# Altium PCB Arduino_CH32X033F8P6.PcbDoc
Units mm, origin at the board's own origin, x right, y up, seen from the top; angles counter-clockwise.
Board outline 31.03 x 20.63 mm, 2 copper layers (Top Layer, Bottom Layer); 21 components, 24 nets, 98 pads, 194 vias.
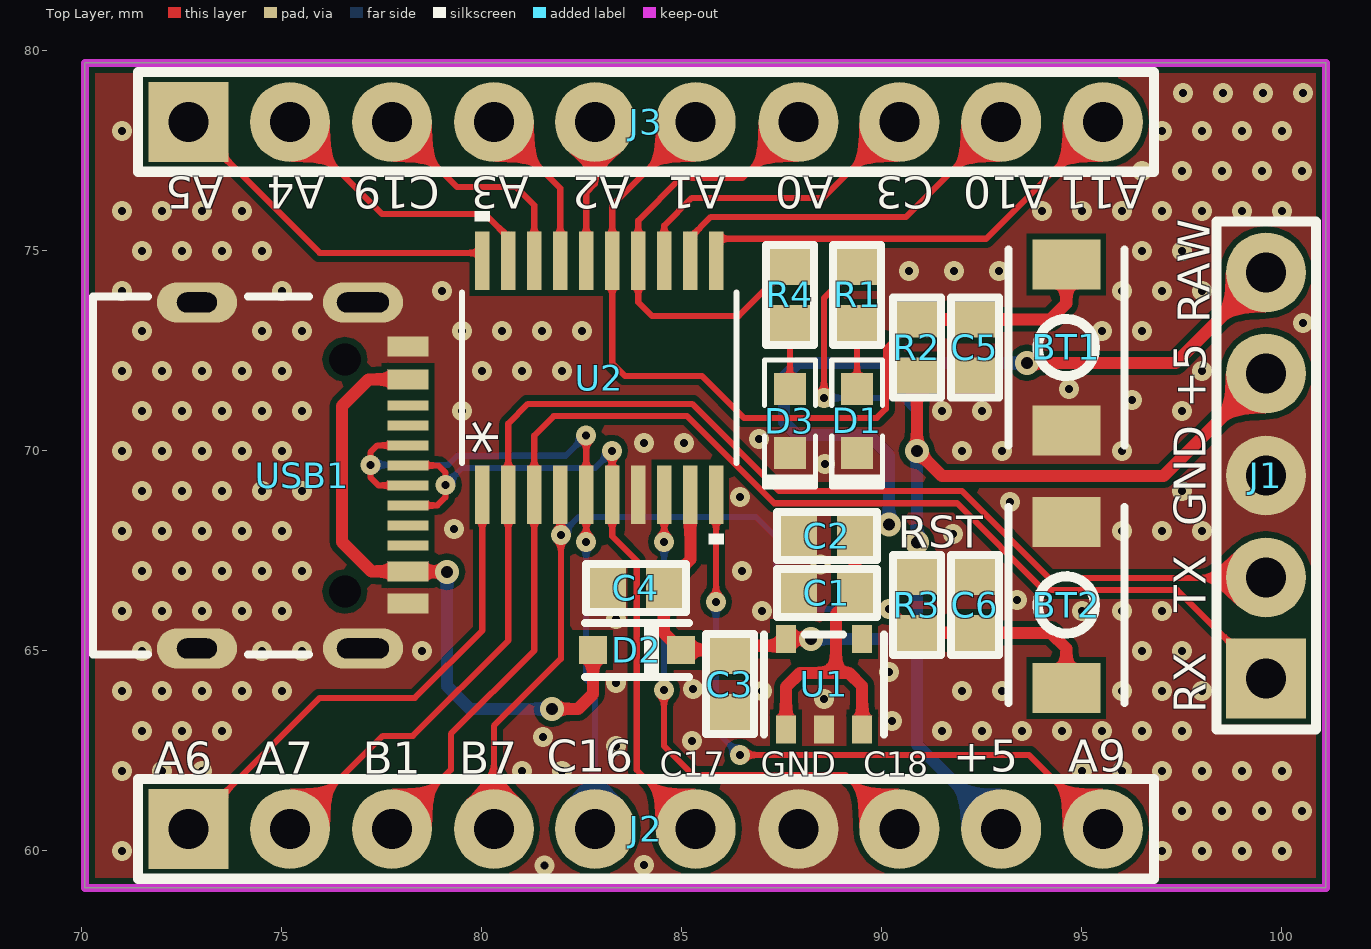
[diagram p0: Top Layer view]
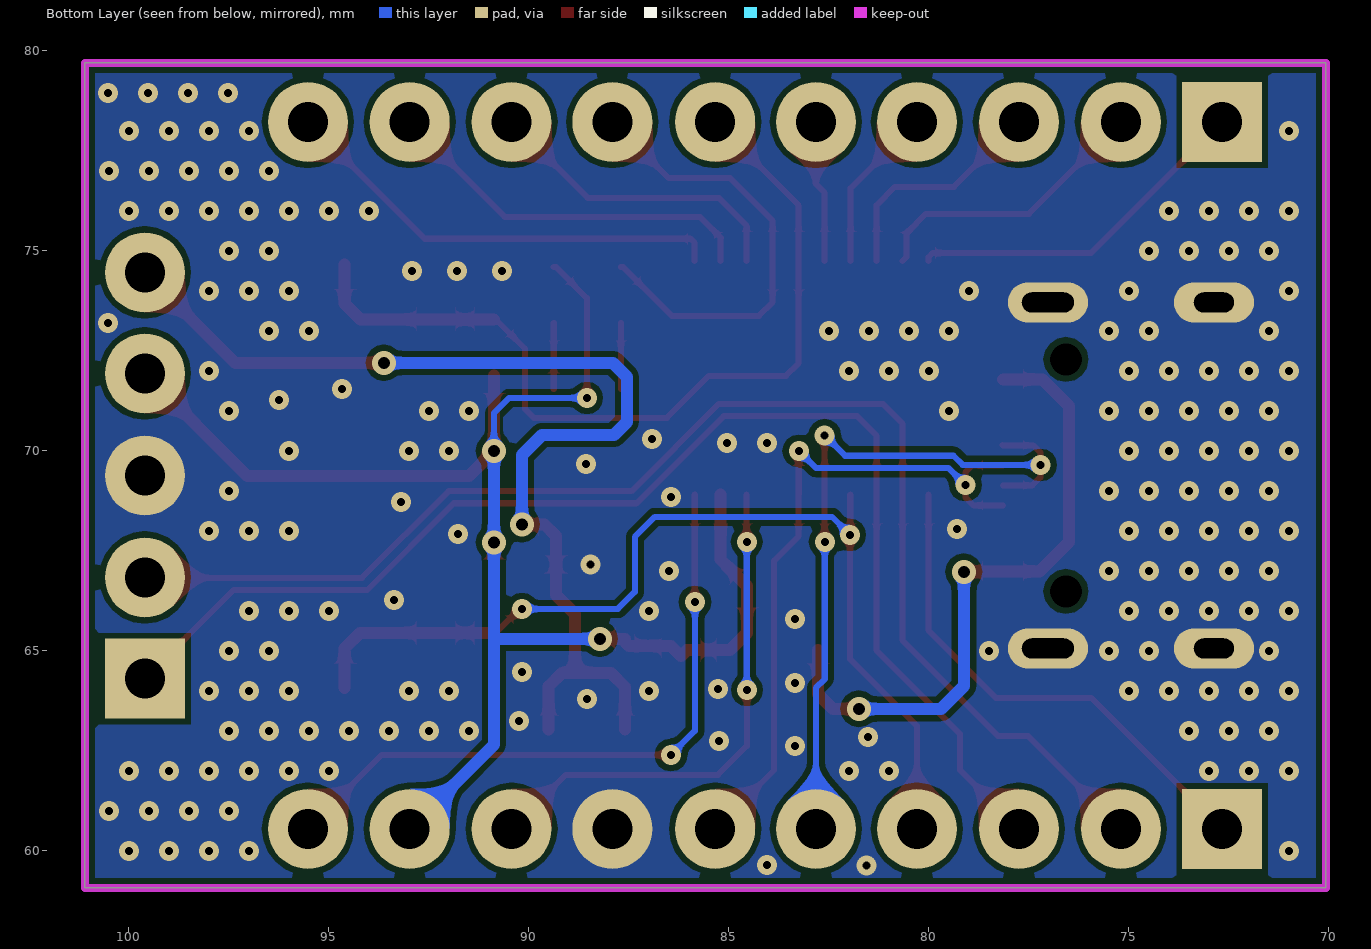
[diagram p1: Bottom Layer view, seen from below]
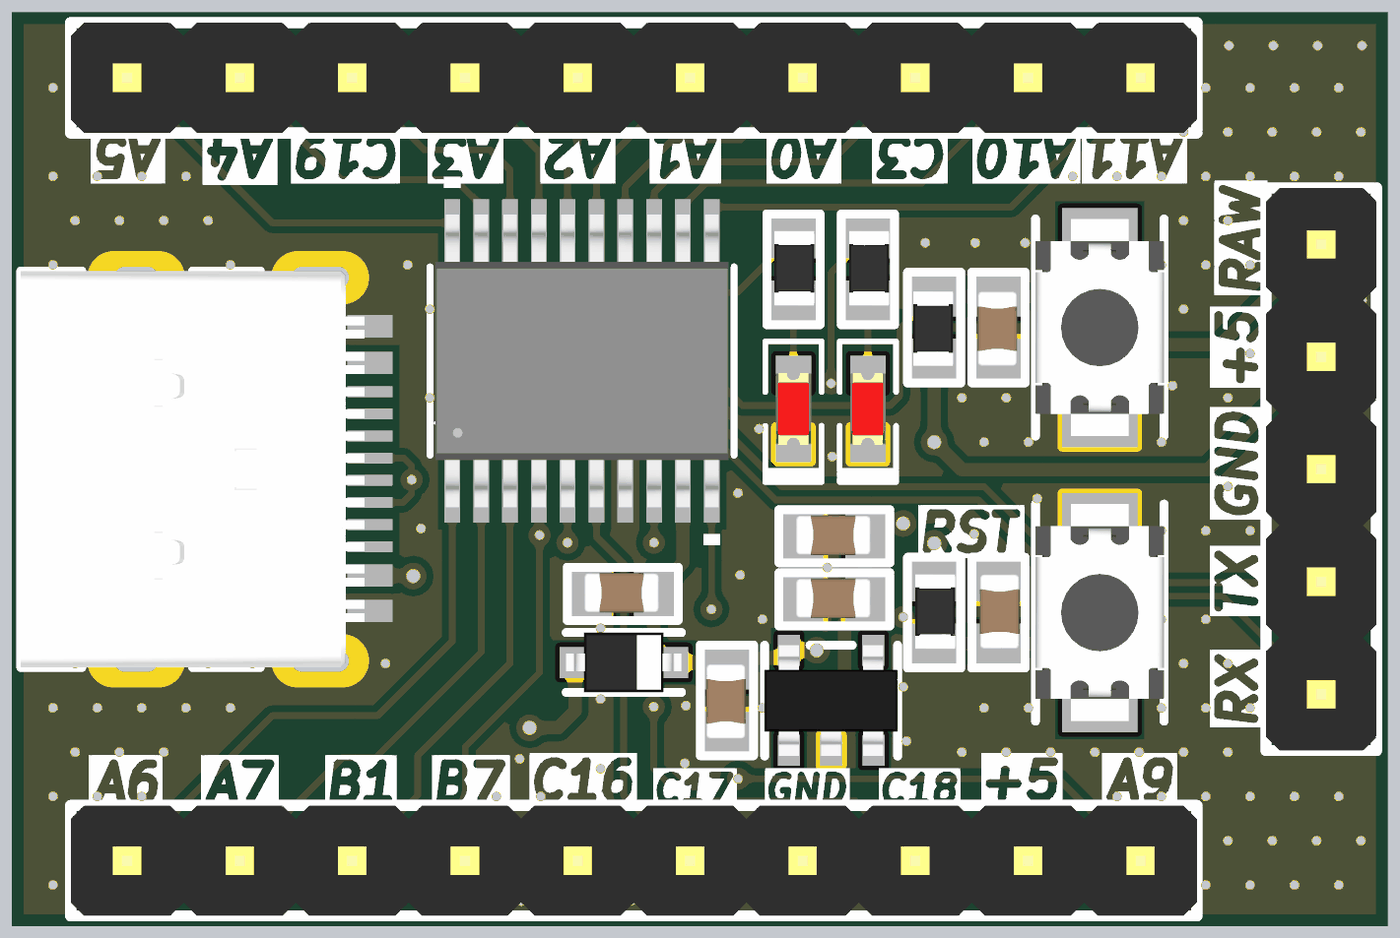
[diagram p2: 3D render of the assembled board from above, using the file's embedded part models]

## Layer stack, top to bottom
Top Solder: solder mask 0.0102, Solder Resist, Dk 3.5
Top Layer: signal copper 0.0356
Dielectric 1: dielectric 0.32, FR-4, Dk 4.8
Bottom Layer: signal copper 0.0356
Bottom Solder: solder mask 0.0102, Solder Resist, Dk 3.5

## Board outline
70.075,59.075 101.1,59.075 101.1,79.7 70.075,79.7

## Design rules (kind name [scope] priority, off if disabled: settings)
Clearance [All] p1: gap=0.152 ignorepadtopadclearanceinfootprint=FALSE
PlaneConnect [All] p1: planeconnectstyle=Direct reliefexpansion=0.508 reliefentries=4 reliefconductorwidth=0.254 reliefairgap=0.254
PolygonConnect [All] p1: connectstyle=Direct reliefconductorwidth=0.254 reliefentries=4 polygonreliefangle="90 Angle" airgapwidth=0.254
RoutingVias [All] p1: holewidth=0.3 width=0.6 viastyle="Through Hole" minholewidth=0.2 minwidth=0.5 maxholewidth=0.5 maxwidth=1
SolderMaskExpansion [All] p1: expansion=0.102 istentingtop=FALSE
Width [All] p1: maxlimit=0.5 minlimit=0.152 preferedwidth=0.3
29 further rules are at their usual default settings.

## Classes and differential pairs
component class Arduino_CH32X033F8P6: BT1 BT2 C3 C4 C5 C6 D1 D3 R1 R2 R3 U1 U2 USB1

## Components (designator, comment, footprint, x,y, rotation, side; value= is the part's Value field where it differs from the comment)
BT1 "Button" "Switch 3x4x2mm" 94.61,70.511 r90 top value="SW chip 2 pin"
BT2 "Button" "Switch 3x4x2mm" 94.61,68.225 r270 top value="SW chip 2 pin"
C1 "0.1uF" "CAP 0603" 88.625,66.475 r180 top
C2 "10uF" "CAP 0603" 88.625,67.9 r180 top
C3 "10uF" "CAP 0603" 86.175,64.17 r270 top
C4 "0.1uF" "CAP 0603" 83.85,66.6 r180 top
C5 "0.1uF" "CAP 0603" 92.3,72.586 r270 top
C6 "0.1uF" "CAP 0603" 92.35,66.15 r90 top
D1 "LED" "LED 0603" 89.38,70.75 r270 top
D2 "1N4148" SOD-323 83.875,65.025 r0 top
D3 "LED" "LED 0603" 87.7,70.75 r270 top
J1 "HEADER 5" "HEADER 5" 99.7,69.162 r90 top
J2 "HEADER 10" "HEADER 10" 83.775,60.695 r0 top
J3 "HEADER 10" "HEADER 10" 83.775,78.37 r0 top
R1 "10K" "RES 0603" 89.405,73.925 r90 top
R2 "100K" "RES 0603" 90.85,72.561 r270 top
R3 "100K" "RES 0603" 90.9,66.175 r90 top
R4 "10K" "RES 0603" 87.725,73.925 r90 top
U1 "MIC5205" SOT23-5 87.601,63.041 r0 top
U2 "CH32X033F8P6" TSSOP20_STM 82.933,71.831 r90 top
USB1 "USB Type C SMD" "USB TYPE C" 74.275,69.363 r90 top

## Footprints (in the part's own frame and the unit in brackets; to place one, negate y for a bottom-side part, rotate by r counter-clockwise, add the part's x,y. Pads: shape width x height; smd on the part's side, far side on the other; paste and mask are expansions set on the pad)
"CAP 0603" [mm]
  rect 0.9x1 smd: 1(-0.7,0.025) 2(0.7,0.025)
  silkscreen extent -1.25,-0.58 1.25,0.63, body extent -0.82,-0.45 0.88,0.45, height 0.9
"HEADER 5" [mm]
  rect 2x2 hole 1: 1(-4.855,0.1)
  round 2 hole 1: 2(-2.325,0.1) 3(0.225,0.1) 4(2.775,0.1) 5(5.3,0.1)
  silkscreen extent -6.12,-1.15 6.58,1.34, body extent -6.12,-1.15 6.58,1.34, height 8.54
"HEADER 10" [mm]
  rect 2x2 hole 1: 1(-11.105,-0.145)
  round 2 hole 1: 2(-8.575,-0.145) 3(-6.025,-0.145) 4(-3.475,-0.145) 5(-0.95,-0.145) 6(1.57,-0.145) 7(4.14,-0.145) 8(6.66,-0.145) 9(9.205,-0.145) 10(11.75,-0.145)
  silkscreen extent -12.38,-1.39 13.02,1.1, body extent -12.38,-1.39 13.02,1.1, height 8.54
"LED 0603" [mm] "Chip LED, 2-Leads, Body 1.6x0.8mm, IPC Medium Density"
  rect 0.8x0.8 smd: 1(-0.8,0) 2(0.8,0)
  silkscreen extent -1.52,-0.64 1.65,0.64, body extent -0.81,-0.4 0.81,0.4, height 0.6
"RES 0603" [mm]
  rect 0.9x1 smd: 1(-0.725,0.025) 2(0.675,0.025)
  silkscreen extent -1.28,-0.58 1.22,0.63, body extent -0.85,-0.45 0.85,0.45, height 0.55
SOD-323 [mm]
  rect 0.7x0.7 smd: 1(-1.1,0) 2(1.1,0)
  silkscreen extent -1.3,-0.67 1.3,0.67, body extent -1.3,-0.67 1.3,0.67, height 1.1
SOT23-5 [mm]
  rect 0.5x0.7 smd: 1(0,0) 2(0.95,0) 3(1.905,0) 4(1.899,2.259) 5(0,2.259)
  silkscreen extent -0.55,-0.13 2.45,2.37, body extent -0.55,-0.13 2.45,2.37, height 1.1
"Switch 3x4x2mm" [mm]
  rect 1.25x1.7 smd: 1(0,0) 2(4.15,0)
  silkscreen extent -0.37,-1.45 4.53,1.45, body extent -0.37,-1.45 4.53,1.45, height 2
TSSOP20_STM [mm]
  rect 1.462x0.355 smd paste+0 mask+0: 1(-2.921,2.925) 2(-2.921,2.275) 3(-2.921,1.625) 4(-2.921,0.975) 5(-2.921,0.325) 6(-2.921,-0.325) 7(-2.921,-0.975) 8(-2.921,-1.625) 9(-2.921,-2.275) 10(-2.921,-2.925) 11(2.921,-2.925) 12(2.921,-2.275) 13(2.921,-1.625) 14(2.921,-0.975) 15(2.921,-0.325) 16(2.921,0.325) 17(2.921,0.975) 18(2.921,1.625) 19(2.921,2.275) 20(2.921,2.925)
  silkscreen extent -4.16,-3.43 4.16,3.43, body extent -3.3,-3.3 3.3,3.3, height 1.2
"USB TYPE C" [mm]
  round 0.65 hole 0.8: 0(-2.875,-2.3) 0(2.925,-2.3)
  rect 0.508x1.016 smd paste+0 mask+0: A1(3.25,-3.875) A4(2.425,-3.875) A9(-2.375,-3.875) A12(-3.175,-3.875)
  oval 1x2 hole 0.5 slot 1.3 at 90 deg: A1(4.35,-2.75) A12(-4.3,-2.75)
  oval 1x2 hole 0.5 slot 1 at 90 deg: A1(4.35,1.4) A12(-4.3,1.4)
  rect 0.254x1.016 smd paste+0 mask+0: A5(1.275,-3.875) A6(0.275,-3.875) A7(-0.225,-3.875) A8(-1.225,-3.875) B5(-1.725,-3.875) B6(-0.725,-3.875) B7(0.775,-3.875) B8(1.775,-3.875)
  silkscreen extent -4.45,-1.4 4.5,4, body extent -4.45,-3.75 4.5,4, height 3.26

## Part data
BT1 BT2: library part "Button 2 Pin"
C1 C2 C3 C4 C5 C6: library part "Capacitor SMD"
D1 D3: library part Led
D2: library part Diode
J1: library part "Header 5"
J2 J3: library part "Header 10"
R1 R2 R3 R4: library part "Resistor SMD"
U1: "150mA Low-Noise LDO Regulator"
U2: library part CH32X035/X033
USB1: library part "USB Type C 16"

## Via types
v1: diameter 0.5, hole 0.2, Top Layer to Bottom Layer, tented both sides, 187 vias
v2: diameter 0.6, hole 0.3, Top Layer to Bottom Layer, tented both sides, 7 vias

## Nets (pads, with @x,y where several pads share a name; then routed paths per layer and width w, separated by ;. In a path a pad name is that pad's centre, name@x,y a point inside that pad or via, vN(x,y) a via of type N, cw(c..) or ccw(c..) an arc to the next point about the centre after c; other vN are vias at no path point)
+5: C3.1 C4.1 D2.2 J1.4 J2.9 R1.2 R2.2 R3.2 U1.5 U2.9 | length 40.6
  Top Layer w0.152: U2.9@85.204,68.906 U2.9 ; v1(88.55,71.325) 88.55,73.82 89.33,74.6 R1.2
  Top Layer w0.3: U2.9 85.208,67.283 84.55,66.625 84.55,65.45 D2.2 86.045,65.025 C3.1 86.455,65.125 87.501,65.125 87.601,65.225 U1.5 v2(88.225,65.3) ; R3.2 v2(90.875,67.716) ; R2.2 v2(90.875,70) 91.5,69.375 97.038,69.375 J1.4
  Bottom Layer w0.152: v1(88.55,71.325) 90.493,71.325 90.875,70.943 v2(90.875,70)
  Bottom Layer w0.3: v2(88.225,65.3) 90.761,65.3 ; v2(90.875,70) v2(90.875,67.716) 90.875,62.655 J2.9
+RAW: C1.1 C2.1 J1.5 U1.1 U1.3 | length 27.9
  Top Layer w0.3: U1.1 87.601,64.101 87.95,64.45 88.85,64.45 ; U1.3 89.506,64.119 89.175,64.45 88.85,64.45 ; v2(90.175,68.163) 89.613,68.163 C2.1 C1.1 89.325,66.4 88.85,65.925 88.85,64.45 ; v2(93.625,72.2) 97.338,72.2 J1.5
  Bottom Layer w0.3: v2(90.175,68.163) 90.175,69.9 89.675,70.4 87.875,70.4 87.55,70.725 87.55,71.85 87.9,72.2 v2(93.625,72.2)
BT_USER: BT1.2 C5.1 J3.6 R2.1 U2.15 | length 21.9
  Top Layer w0.152: J3.6 83.258,76.138 U2.15 83.258,72.192 83.575,71.875 85.5,71.875 86.55,70.825 89.875,70.825 90.1,71.05 90.1,72.561 90.825,73.286 R2.1
  Top Layer w0.3: R2.1 C5.1 94.211,73.286 94.61,73.685 BT1.2
GND: BT1.1 BT2.1 C1.2 C2.2 C3.2 C4.2 C5.2 C6.2 D1.2 D3.2 J1.3 J2.7 U1.2 U2.7 USB1.A1 USB1.A12
  other v1: 81.561,59.641 84.05,59.65 71,60 97,60 98,60 99,60 100,60 97.5,61 98.5,61 99.5,61 100.5,61 71,62 72,62 73,62 81,62 82,62 95,62 96,62 97,62 98,62 99,62 100,62 83.35,62.625 85.25,62.75 81.525,62.85 71.5,63 72.5,63 73.5,63 91.5,63 92.5,63 93.5,63 94.5,63 95.5,63 96.5,63 97.5,63 90.25,63.25 88.55,63.8 71,64 72,64 73,64 74,64 75,64 87,64 92,64 93,64 96,64 97,64 98,64 85.275,64.05 83.35,64.2 90.175,64.475 71.5,65 74.5,65 75.5,65 78.5,65 96.5,65 97.5,65 83.35,65.8 71,66 72,66 73,66 74,66 75,66 87,66 95,66 96,66 97,66 93.375,66.275 71.5,67 72.5,67 73.5,67 74.5,67 75.5,67 86.5,67 88.463,67.167 91.775,67.925 71,68 72,68 73,68 74,68 75,68 96,68 97,68 98,68 79.3,68.05 93.2,68.725 86.45,68.85 71.5,69 72.5,69 73.5,69 74.5,69 75.5,69 97.5,69 88.575,69.675 71,70 72,70 73,70 74,70 75,70 92,70 93,70 96,70 84.05,70.2 85.05,70.2 86.925,70.3 71.5,71 72.5,71 73.5,71 74.5,71 75.5,71 79.5,71 91.5,71 92.5,71 97.5,71 96.25,71.275 94.675,71.55 71,72 72,72 73,72 74,72 75,72 80,72 81,72 82,72 98,72 71.5,73 74.5,73 75.5,73 79.5,73 80.5,73 81.5,73 82.5,73 95.5,73 96.5,73 100.525,73.2 71,74 75,74 79,74 96,74 97,74 98,74 90.675,74.5 91.8,74.5 92.925,74.5 71.5,75 72.5,75 73.5,75 74.5,75 96.5,75 97.5,75 71,76 72,76 73,76 74,76 94,76 95,76 96,76 97,76 98,76 99,76 100,76 96.5,77 97.5,77 98.5,77 99.5,77 100.5,77 71,78 97,78 98,78 99,78 100,78 97.525,78.95 98.525,78.95 99.525,78.95 100.525,78.95
LED_USER: J3.7 R4.2 U2.14 | length 11.5
  Top Layer w0.152: R4.2 87.65,74.6 86.425,73.375 84.25,73.375 83.908,73.717 U2.14 83.908,75.758 84.975,76.825 86.515,76.825 J3.7
NetD1_1: D1.1 R1.1 | length 1.7
  Top Layer w0.152: D1.1 R1.1
NetD2_1: D2.1 USB1.A4 USB1.A9 | length 16.3
  Top Layer w0.3: USB1.A4 77.162,71.787 76.5,71.125 76.5,67.725 77.237,66.988 USB1.A9 78.156,66.981 79.119,66.981 v2(79.125,66.975) ; v2(81.75,63.55) 82.4,63.55 82.775,63.925 D2.1
  Bottom Layer w0.3: v2(79.125,66.975) 79.125,64.125 79.7,63.55 v2(81.75,63.55)
NetD3_1: D3.1 R4.1 | length 1.7
  Top Layer w0.152: D3.1 R4.1
PA2: J3.5 U2.16 | length 3.6
  Top Layer w0.152: U2.16 82.608,76.458 82.825,76.675 J3.5
PA3: J3.4 U2.17 | length 4.2
  Top Layer w0.152: J3.4 81.958,76.567 U2.17
PA4: J3.2 U2.19 | length 7.2
  Top Layer w0.152: J3.2 77.5,75.925 80.075,75.925 80.557,75.443 80.557,74.853 U2.19
PA5: J3.1 U2.20 | length 8.8
  Top Layer w0.152: J3.1 75.945,74.95 79.907,74.95 80.008,74.849 U2.20
PA6: J2.1 U2.1 | length 12.8
  Top Layer w0.152: J2.1 75.945,63.825 78.325,63.825 80.008,65.508 U2.1
PA7: J1.2 J2.2 U2.2 | length 33.8
  Top Layer w0.152: J2.2 77.525,62.875 78.275,62.875 80.658,65.258 U2.2 80.658,70.683 81.15,71.175 85.256,71.175 87.434,68.997 91.343,68.997 92.004,68.996 94.175,66.825 99.588,66.825 J1.2
PA9: J2.10 U2.10 | length 16.6
  Top Layer w0.152: v1(85.85,66.225) 85.854,66.229 85.854,68.906 U2.10 ; v1(86.45,62.4) 93.675,62.4 J2.10
  Bottom Layer w0.152: v1(85.85,66.225) 85.85,63 v1(86.45,62.4)
PA10: J3.9 U2.12 | length 9.5
  Top Layer w0.152: U2.12@85.194,75.32 85.724,75.85 90.605,75.85 J3.9 ; U2.12 U2.12@85.208,75.306
PA11: J3.10 U2.11 | length 11.4
  Top Layer w0.152: U2.11 85.858,75.204 85.959,75.306 92.606,75.306 J3.10
PB1: J1.1 J2.3 U2.3 | length 32.5
  Top Layer w0.152: J2.3 79.225,62.025 79.225,62.925 81.308,65.008 U2.3 81.308,70.383 81.795,70.87 85.129,70.87 87.308,68.692 91.877,68.692 94.049,66.52 97.387,66.52 J1.1
PB7: BT2.2 C6.1 J2.4 R3.1 U2.4 | length 25
  Top Layer w0.152: J2.4 80.3,63.125 81.974,64.799 v1(81.974,67.901) 81.966,67.909 81.966,68.902 U2.4 ; v1(90.177,66.049) 90.226,66.049 90.825,65.45 R3.1
  Top Layer w0.3: R3.1 C6.1 94.225,65.45 94.61,65.065 BT2.2
  Bottom Layer w0.152: v1(81.974,67.901) 82.423,68.35 86.85,68.35 87.35,67.85 87.35,66.475 87.776,66.049 v1(90.177,66.049)
PC3: J3.8 U2.13 | length 7.8
  Top Layer w0.152: U2.13 84.558,75.633 85.25,76.325 88.535,76.325 J3.8
PC16: J2.5 U2.5 USB1.A7 USB1.B7 | length 18.3
  Top Layer w0.152: USB1.A7 77.413,69.137 77.213,69.338 v1(77.213,69.65) 77.213,69.963 77.388,70.138 USB1.B7 USB1.B7@78.156,70.144 ; v1(82.606,70.392) v1(82.606,70.392) 82.607,68.911 U2.5 v1@82.608,67.733
  Bottom Layer w0.152: v1(77.213,69.65) 79.156,69.65 79.386,69.88 82.094,69.88 v1(82.606,70.392) ; v1(82.604,67.729) 82.604,64.296 82.825,64.075 J2.5
PC17: J2.6 U2.6 USB1.A6 USB1.B6 | length 17.5
  Top Layer w0.152: USB1.B6 78.887,68.638 79.087,68.838 v1(79.087,69.15) 79.087,69.463 78.913,69.638 USB1.A6 ; v1(83.252,70) 83.255,69.997 83.255,68.913 U2.6 83.258,67.867 83.871,67.254 83.871,62.024 J2.6
  Bottom Layer w0.152: v1(79.087,69.15) 79.512,69.575 82.827,69.575 v1(83.252,70)
PC18: J2.8 U2.8 | length 13
  Top Layer w0.152: v1(84.55,64.025) 84.55,62.625 85.275,61.9 89.085,61.9 J2.8 ; v1@84.558,67.733 U2.8
  Bottom Layer w0.152: v1(84.55,64.025) 84.554,64.029 v1(84.554,67.729)
PC19: J3.3 U2.18 | length 5.8
  Top Layer w0.152: J3.3 79.375,76.6 80.85,76.6 81.308,76.142 U2.18
pads on no net: U1.4 USB1.0 USB1.A5 USB1.A8 USB1.B5 USB1.B8

## Polygon pours and split planes (outlines as drawn)
GND on Bottom Layer "NONET_L-01_P-001" (solid, remove dead copper, pour order 1): 70.075,79.7 70.075,59.075 101.1,59.075 101.1,79.7
GND on Top Layer "NONET_L-01_P-001" (solid, remove dead copper, pour order 0): 70.075,79.7 70.075,59.075 101.1,59.075 101.1,79.7

## Keep-outs
Keep-Out Layer:
  lines w0.2: 70.075,59.075 74.3,59.075 101.1,59.075 101.1,79.7 70.075,79.7 70.075,59.075

## Silkscreen, mask and mechanical layers (free items; w line width, h text height)
Top Overlay:
  text "A5" at 73.536,76.85 h0.8 r180
  text "A4" at 76.066,76.85 h0.8 r180
  text "C19" at 78.95,76.85 h0.8 r180
  text "A3" at 81.166,76.85 h0.8 r180
  text "A2" at 83.691,76.85 h0.8 r180
  text "A1" at 86.078,76.85 h0.8 r180
  text "A0" at 88.781,76.85 h0.8 r180
  text "C3" at 91.301,76.85 h0.8 r180
  text "A10" at 94.18,76.85 h0.8 r180
  text "A11" at 96.591,76.85 h0.8 r180
  text "RAW" at 98.2,73.196 h0.8 r90
  text "+5" at 98.1,71.071 h0.8 r90
  text "GND" at 98.1,68.121 h0.8 r90
  text "RST" at 90.4,67.575 h0.8
  text "TX" at 98.1,65.971 h0.8 r90
  text "RX" at 98.1,63.441 h0.8 r90
  text "C16" at 81.625,61.975 h0.8
  text "+5" at 91.78,61.975 h0.8
  text "A9" at 94.659,61.975 h0.8
  text "A6" at 71.803,61.925 h0.8
  text "A7" at 74.334,61.925 h0.8
  text "B1" at 77.017,61.925 h0.8
  text "B7" at 79.434,61.925 h0.8
  text "C17" at 84.445,61.875 h0.6
  text "GND" at 86.965,61.875 h0.6
  text "C18" at 89.535,61.875 h0.6

## Text inside footprints (layer, text, board x,y; h text height)
U2: Top Overlay "*" at 80.9,69.9 h1.27 r90